# Altium PCB trd5.PcbDoc
Units mm, origin at the board's own origin, x right, y up, seen from the top; angles counter-clockwise.
Board outline 152.4 x 101.6 mm, 2 copper layers (Top Layer, Bottom Layer); 70 components, 140 nets, 475 pads, 133 vias.
Unrouted connection lines stored in the file: 53.
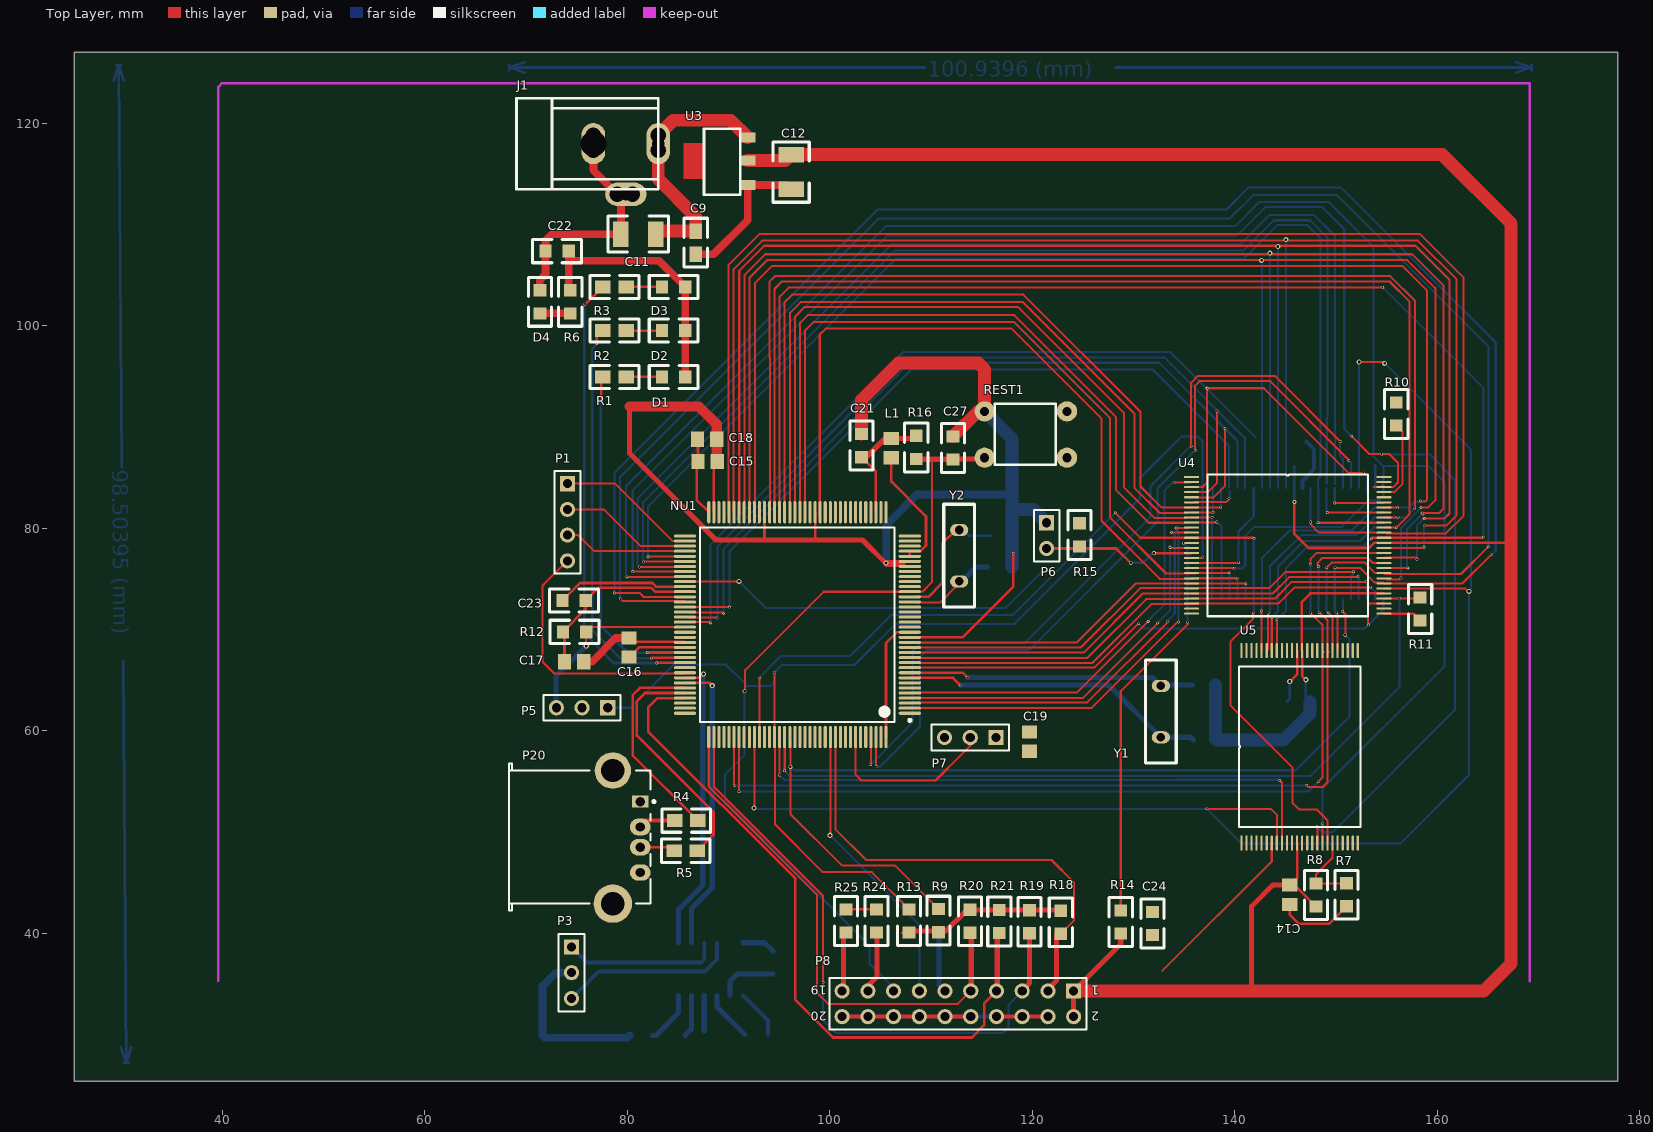
[diagram p0: Top Layer view]
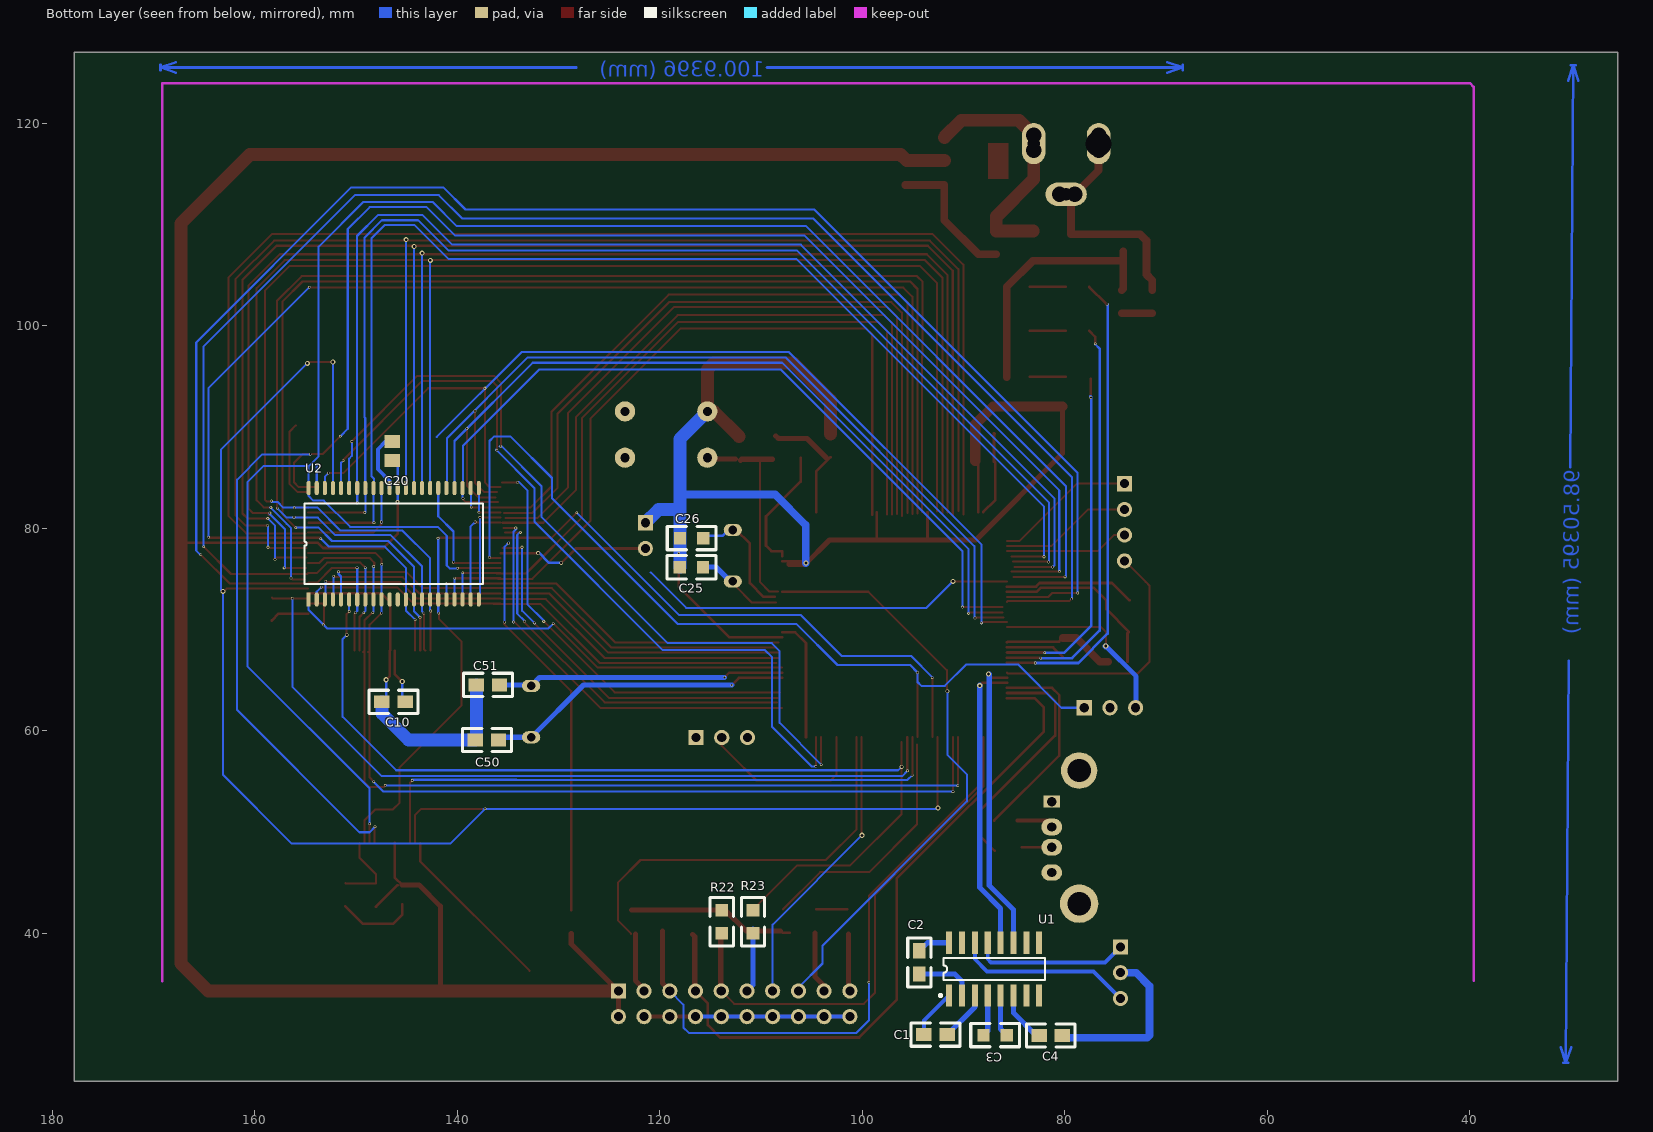
[diagram p1: Bottom Layer view, seen from below]

## Layer stack, top to bottom
Top Layer: signal copper 0.0356
Dielectric: dielectric 0.32, FR-4, Dk 4.8
Bottom Layer: signal copper 0.0356

## Board outline
25.4,25.4 177.8,25.4 177.8,127 25.4,127

## Design rules (kind name [scope] priority, off if disabled: settings)
Clearance [All] p1: gap=0.152
PolygonConnect [All] p1: connectstyle=Relief reliefconductorwidth=0.254 reliefentries=4 polygonreliefangle="90 Angle"
RoutingVias [All] p1: holewidth=0.711 width=1.27 viastyle="Through Hole" minholewidth=0.711 minwidth=1.27 maxholewidth=0.711 maxwidth=1.27
SilkscreenOverComponentPads [All] p1: minsilkscreentomaskgap=0.254
SolderMaskExpansion [All] p1: expansion=0.102
TestPointUsage [All] p1: valid=0 allowmultiple=FALSE
Testpoint [All] p1: side=15 testpointundercomponent=TRUE minsize=1.016 maxsize=2.54 preferedsize=1.524 minholesize=0 maxholesize=1.016 preferedholesize=0.813 testpointgrid=0.025 style=1023 order=0123456789
Width [All] p1: maxlimit=1.27 minlimit=0.152 preferedwidth=0.254 minimp=50.000000 maximp=50.000000 favimp=50.000000
23 further rules are at their usual default settings.

## Classes and differential pairs
net class R3_Nets: NetD3_2 PC8
net class R2_Nets: NetD2_2 PC7
net class R1_Nets: NetD1_2 PC6
net class R19_Nets: PA15 VDD33
net class U4_Nets: A0 A1 A2 A3 A4 A5 A6 A7 A8 A9 A10 A11 A12 A13 A14 A15 A16 A17 A18 A19 A20 A21 A22 D0 D1 D2 D3 D4 D5 D6 D7 D8 D9 D10 D11 D12 D13 D14 D15 GND NetC24_1 NetP6_2 NetR10_1 NetU4_1 NetU4_27 NetU4_28 NetU4_30 NetU4_55 NetU4_56 PD4 PD5 PD6 PG9 VDD33
net class D[0..15]: AD0 AD1 AD2 AD3 AD4 AD5 AD6 AD7 AD8 AD9 AD10 AD11 AD12 AD13 AD14 AD15 AD16 AD17 AD18 AD19 AD20 AD21 AD22 AD23 D0 D1 D2 D3 D4 D5 D6 D7 D8 D9 D10 D11 D12 D13 D14 D15 DATA0 DATA1 DATA2 DATA3 DATA4 DATA5 DATA6 DATA7 DATA8 DATA9 DATA10 DATA11 DATA12 DATA13 DATA14 DATA15 NetU4_1 NetU4_27 NetU4_28 NetU4_30 NetU4_55 NetU4_56
net class U5_Nets: A16 A17 D0 D1 D2 D3 D4 D5 D6 D7 GND NetP5_2 NetR7_1 PD4 PD5 PD7 VDD33
net class A[0..23]: A0 A1 A2 A3 A4 A5 A6 A7 A8 A9 A10 A11 A12 A13 A14 A15 A16 A17 A18 A19 A20 A21 A22 A23 NetU4_1 NetU4_27 NetU4_28 NetU4_30 NetU4_55 NetU4_56
net class U3_Nets: GND VDD5 VDD33
net class U2_Nets: A0 A1 A2 A3 A4 A5 A6 A7 A8 A9 A10 A11 A12 A13 A14 A15 A16 A17 A18 D0 D1 D2 D3 D4 D5 D6 D7 D8 D9 D10 D11 D12 D13 D14 D15 GND PD4 PD5 PE0 PE1 PG10 VDD33
net class REST1_Nets: GND NRST
net class R25_Nets: GND NetP8_19
net class R24_Nets: GND NetP8_17
net class R23_Nets: GND NetP8_11
net class R22_Nets: GND PA14
net class R21_Nets: PA13 VDD33
net class R20_Nets: PA14 VDD33
net class R18_Nets: PB4 VDD33
net class R16_Nets: NRST VDD33
net class R15_Nets: NetP6_2 VDD33
net class R14_Nets: NetC24_1 VDD33
net class R13_Nets: PD6 VDD33
net class R12_Nets: PG6 VDD33
net class R11_Nets: PG9 VDD33
net class R10_Nets: NetR10_1 VDD33
net class R9_Nets: PG10 VDD33
net class R8_Nets: NetR7_1 VDD33
net class R7_Nets: GND NetR7_1
net class R6_Nets: NetD4_1 VDD33
net class R5_Nets: NetP20_3 PA12
net class R4_Nets: NetP20_2 PA11
net class P20_Nets: GND NetP20_2 NetP20_3 NetP20_5 NetP20_6 "USB 5V"
net class P8_Nets: GND NetP8_11 NetP8_17 NetP8_19 NRST PA13 PA14 PA15 PB3 PB4 VDD33
net class P7_Nets: BOOT0 GND VDD33
net class P6_Nets: GND NetP6_2
net class P5_Nets: NetP5_2 PD6 PG6
net class P3_Nets: GND R1IN T1OUT
net class P1_Nets: PA5 PA6 PA7 PA8
net class NU1_Nets: A0 A1 A2 A3 A4 A5 A6 A7 A8 A9 A10 A11 A12 A13 A14 A15 A16 A17 A18 A19 A20 A21 A22 A23 BOOT0 D0 D1 D2 D3 D4 D5 D6 D7 D8 D9 D10 D11 D12 D13 D14 D15 GND LED0 LED1 LED2 NetL1_1 NetNU1_6 NetNU1_106 NRST OSCIN OSCOUT PA0 PA1 PA2 PA3 PA4 PA5 PA6 PA7 PA8 PA9 PA10 PA11 PA12 PA13 PA14 PA15 PB0 PB1 PB2 PB3 PB4 PB5 PB6 PB7 PB8 PB9 PB10 PB11 PB12 PC0 PC1 PC2 PC3 PC4 PC5 PC6 PC7 PC8 PC9 PC10 PC11 PC12 PC13 PC14 PC15 PD2 PD3 PD4 PD5 PD6 PD7 PE0 PE1 PF6 PF10 PF11 PG6 PG7 PG8 PG9 PG10 PG11 PG12 PG13 PG14 PG15 VDD33
net class L1_Nets: NetL1_1 VDD33
net class J1_Nets: GND VDD5
net class D4_Nets: GND NetD4_1
net class D3_Nets: NetD3_2 VDD33
net class D2_Nets: NetD2_2 VDD33
net class D1_Nets: NetD1_2 VDD33
net class C27_Nets: GND NRST
net class C25_Nets: GND OSCIN
net class C24_Nets: GND NetC24_1
net class C23_Nets: GND VDD33
net class C22_Nets: GND VDD33
net class C21_Nets: GND VDD33
net class C20_Nets: GND VDD33
net class C19_Nets: GND VDD33
net class C18_Nets: GND VDD33
net class C17_Nets: GND VDD33
net class C16_Nets: GND VDD33
net class C15_Nets: GND VDD33
net class C14_Nets: GND VDD33
net class C12_Nets: GND VDD33
net class C11_Nets: GND VDD5
net class C10_Nets: GND VDD33
net class C9_Nets: GND VDD5
net class C7_Nets: GND VDD33
net class C3_Nets: NetC3_1 NetC3_2
net class C1_Nets: NetC1_1 NetC1_2
component class "XLAT AND JTAG": C25 C26 C27 P7 P8 R16 R18 R19 R20 R21 R22 R23 R24 R25 REST1 Y2
component class STORAGE: C21 C22 C23 C24 P5 P6 R7 R8 R9 R10 R11 R12 R13 R14 R15 U2 U4 U5
component class POWER: C7 C9 C10 C11 C12 C14 C15 C16 C17 C18 C19 C20 D4 J1 L1 NU1 R6 U3
component class EXTERN: 1 C1 C2 C3 C4 D1 D2 D3 P1 P3 P20 R1 R2 R3 R4 R5 U1
net class C2_Nets: NetC2_2 VDD5
net class C4_Nets: GND NetC4_1
net class U1_Nets: GND NetC1_1 NetC1_2 NetC2_2 NetC3_1 NetC3_2 NetC4_1 NetU1_7 NetU1_8 NetU1_9 NetU1_10 PA9 PA10 R1IN T1OUT VDD5
net class C26_Nets: GND OSCOUT
net class Y2_Nets: OSCIN OSCOUT
component class GPIO_OUT: C50 C51 Y1
net class C50_Nets: GND PC14
net class C51_Nets: GND PC15
net class Y1_Nets: PC14 PC15

## Components (designator, comment, footprint, x,y, rotation, side; value= is the part's Value field where it differs from the comment)
C1 "0.1uF" 0805#1 93.904,29.997 r180 bottom
C2 "0.1uF" 0805#1 94.361,38.278 r270 bottom
C3 "0.1uF" 0805#2 85.725,29.947 r0 bottom
C4 "0.1uF" 0805#1 82.525,29.921 r180 bottom
C9 "102" 0805#1 86.766,109.347 r270 top
C10 "102" 0805#1 145.136,62.865 r0 bottom
C11 "2.2uf" 1210 82.804,109.042 r180 top
C12 "2.2uf" 1210 96.19,116.891 r270 top
C14 "Cap" 6-0805 145.415,43.815 r90 top
C15 "Cap" 6-0805 87.935,86.589 r180 top
C16 "Cap" 6-0805 80.188,68.224 r270 top
C17 "Cap" 6-0805 74.752,66.827 r180 top
C18 "Cap" 6-0805 87.884,88.798 r180 top
C19 "Cap" 6-0805 119.71,58.928 r90 top
C20 "Cap" 6-0805 146.406,87.63 r270 bottom
C21 "Cap" 0805#2 103.124,87.02 r90 top
C22 "Cap" 0805#2 74.219,107.366 r180 top
C23 "Cap" 0805#2 75.895,72.873 r180 top
C24 "Cap" 0805#2 131.877,42.113 r270 top
C25 "Cap" 0805#2 118.008,76.149 r180 bottom
C26 "Cap" 0805#2 117.983,79.019 r180 bottom
C27 "Cap" 0805#2 112.166,89.078 r270 top
C50 "Cap" 0805#1 138.201,59.106 r180 bottom
C51 "Cap" 0805#1 138.1,64.541 r180 bottom
D1 "LED0" 0805#2 85.725,94.945 r180 top
D2 "LED0" 0805#2 85.725,99.517 r180 top
D3 "LED0" 0805#2 85.725,103.835 r180 top
D4 "LED3" 0805#2 71.374,101.219 r90 top
J1 "PWR2.5" Power_In 76.2,120.269 r0 top
L1 "Inductor" 6-0805 106.07,87.909 r90 top
NU1 "STM32F103ZET6" LQFN144 96.799,70.485 r180 top
P1 "Header 4" HDR1X4 74.092,84.404 r270 top
P3 "Header 3" HDR1X3 74.498,38.659 r270 top
P5 "Header 3" HDR1X3 78.08,62.281 r180 top
P6 "Header 2" HDR1X2 121.412,80.543 r270 top
P7 "Header 3" HDR1X3 116.408,59.334 r180 top
P8 "Header 10X2" HDR2X10 124.079,34.315 r180 top
P20 "P10" 787616 68.301,49.505 r180 top
R1 "Res2" 0805#1 77.597,94.945 r0 top
R2 "Res2" 0805#1 77.597,99.517 r0 top
R3 "Res2" 0805#1 77.597,103.835 r0 top
R4 "Res2" 0805#1 84.684,51.13 r0 top
R5 "Res2" 0805#1 84.633,48.158 r0 top
R6 "Res2" 0805#2 74.371,101.219 r90 top
R7 "Res2" 0805#2 151.028,44.958 r270 top
R8 "Res2" 0805#2 148.006,42.647 r90 top
R9 "Res2" 0805#2 110.744,42.393 r270 top
R10 "Res2" 0805#2 155.931,90.145 r90 top
R11 "Res2" 0805#2 158.293,73.177 r270 top
R12 "Res2" 0805#2 75.946,69.774 r180 top
R13 "Res2" 0805#2 107.823,40.081 r90 top
R14 "Res2" 0805#2 128.727,39.98 r90 top
R15 "Res2" 0805#2 124.663,80.493 r270 top
R16 "Res2" 0805#2 108.534,86.843 r90 top
R18 "Res2" 0805#2 122.809,39.954 r90 top
R19 "Res2" 0805#2 119.71,40.005 r90 top
R20 "Res2" 0805#2 113.843,40.056 r90 top
R21 "Res2" 0805#2 116.738,40.03 r90 top
R22 "Res2" 0805#2 113.868,40.005 r90 bottom
R23 "Res2" 0805#2 110.795,40.005 r90 bottom
R24 "Res2" 0805#2 104.623,40.081 r90 top
R25 "Res2" 0805#2 101.6,40.081 r90 top
REST1 "SW_PB" SWPB 123.419,91.542 r0 top
U1 "MAX232-2" SOIC16 86.97,36.474 r180 bottom
U2 "IS61LV51216-10T" TSOP44 154.661,72.974 r90 bottom
U3 "LM1117-3.3" SOT-223 87.579,112.954 r90 top
U4 "M29W128GL" TSOP56 135.712,85.065 r0 top
U5 "NAND512W3A2CN6E" TSOP48 140.64,48.92 r90 top
Y1 "XTAL" XTAL-1 132.69,64.44 r270 top
Y2 "XTAL" XTAL-1 112.776,79.832 r270 top

## Footprints (in the part's own frame and the unit in brackets; to place one, negate y for a bottom-side part, rotate by r counter-clockwise, add the part's x,y. Pads: shape width x height; smd on the part's side, far side on the other; paste and mask are expansions set on the pad)
6-0805 [mm] "Chip Resistor; Body 2.0 x 1.3 mm (LxW typ)"
  rect 1.3x1.5 smd: 1(-0.95,0) 2(0.95,0)
0805#1 [mil]
  rect 60x50 smd: 1(0,0) 2(90,0)
  silkscreen extent -50,-45 140,45
0805#2 [mil]
  rect 47.37x50 smd: 1(0,0) 2(90,0)
  silkscreen extent -50,-45 140,45
1210 [mil]
  rect 60x100 smd: 1(0,0) 2(135,0)
  silkscreen extent -50,-70 185,70
787616 [mm] "Connector; USB1.1, Type A, Thru-Hole; 4 Position; Right Angle"
  rect 1.606x1.2 hole 0.92: 1(-12.99,-3.5)
  oval 2.057x1.676 hole 0.92: 2(-12.99,-1) 3(-12.99,1)
  oval 2.057x1.6 hole 0.92: 4(-12.99,3.5)
  round 3.8 hole 2.3: 5(-10.28,6.57)
  round 3.6 hole 2.3: 6(-10.28,-6.57)
  silkscreen extent -14.47,-7.25 0,7.25
HDR1X2 [mm] "Connector; Header; 2 Position"
  rect 1.5x1.5 hole 0.9: 1(0,0)
  round 1.5 hole 0.9: 2(2.54,0)
  silkscreen extent -1.27,-1.27 3.81,1.27
HDR1X3 [mm] "Connector; Header; 3 Position"
  rect 1.5x1.5 hole 0.9: 1(0,0)
  round 1.5 hole 0.9: 2(2.54,0) 3(5.08,0)
  silkscreen extent -1.27,-1.27 6.35,1.27
HDR1X4 [mm] "Connector; Header; 4 Position"
  rect 1.5x1.5 hole 0.9: 1(0,0)
  round 1.5 hole 0.9: 2(2.54,0) 3(5.08,0) 4(7.62,0)
  silkscreen extent -1.27,-1.27 8.89,1.27
HDR2X10 [mm] "Connector; Header; 10x2 Position"
  rect 1.5x1.5 hole 0.9: 1(0,0)
  round 1.5 hole 0.9: 2(0,2.54) 3(2.54,0) 4(2.54,2.54) 5(5.08,0) 6(5.08,2.54) 7(7.62,0) 8(7.62,2.54) 9(10.16,0) 10(10.16,2.54) 11(12.7,0) 12(12.7,2.54) 13(15.24,0) 14(15.24,2.54) 15(17.78,0) 16(17.78,2.54) 17(20.32,0) 18(20.32,2.54) 19(22.86,0) 20(22.86,2.54)
  silkscreen extent -1.27,-1.27 24.13,3.81
LQFN144 [mm] "TSQFP, 144-Leads, Body 23.8x23.8mm (max), Pitch 0.50mm, IPC Medium Density"
  oval 2.2x0.3 smd: 1(-11.1,8.75) 2(-11.1,8.25) 3(-11.1,7.75) 4(-11.1,7.25) 5(-11.1,6.75) 6(-11.1,6.25) 7(-11.1,5.75) 8(-11.1,5.25) 9(-11.1,4.75) 10(-11.1,4.25) 11(-11.1,3.75) 12(-11.1,3.25) 13(-11.1,2.75) 14(-11.1,2.25) 15(-11.1,1.75) 16(-11.1,1.25) 17(-11.1,0.75) 18(-11.1,0.25) 19(-11.1,-0.25) 20(-11.1,-0.75) 21(-11.1,-1.25) 22(-11.1,-1.75) 23(-11.1,-2.25) 24(-11.1,-2.75) 25(-11.1,-3.25) 26(-11.1,-3.75) 27(-11.1,-4.25) 28(-11.1,-4.75) 29(-11.1,-5.25) 30(-11.1,-5.75) 31(-11.1,-6.25) 32(-11.1,-6.75) 33(-11.1,-7.25) 34(-11.1,-7.75) 35(-11.1,-8.25) 36(-11.1,-8.75) 73(11.1,-8.75) 74(11.1,-8.25) 75(11.1,-7.75) 76(11.1,-7.25) 77(11.1,-6.75) 78(11.1,-6.25) 79(11.1,-5.75) 80(11.1,-5.25) 81(11.1,-4.75) 82(11.1,-4.25) 83(11.1,-3.75) 84(11.1,-3.25) 85(11.1,-2.75) 86(11.1,-2.25) 87(11.1,-1.75) 88(11.1,-1.25) 89(11.1,-0.75) 90(11.1,-0.25) 91(11.1,0.25) 92(11.1,0.75) 93(11.1,1.25) 94(11.1,1.75) 95(11.1,2.25) 96(11.1,2.75) 97(11.1,3.25) 98(11.1,3.75) 99(11.1,4.25) 100(11.1,4.75) 101(11.1,5.25) 102(11.1,5.75) 103(11.1,6.25) 104(11.1,6.75) 105(11.1,7.25) 106(11.1,7.75) 107(11.1,8.25) 108(11.1,8.75)
  oval 0.3x2.2 smd: 37(-8.75,-11.1) 38(-8.25,-11.1) 39(-7.75,-11.1) 40(-7.25,-11.1) 41(-6.75,-11.1) 42(-6.25,-11.1) 43(-5.75,-11.1) 44(-5.25,-11.1) 45(-4.75,-11.1) 46(-4.25,-11.1) 47(-3.75,-11.1) 48(-3.25,-11.1) 49(-2.75,-11.1) 50(-2.25,-11.1) 51(-1.75,-11.1) 52(-1.25,-11.1) 53(-0.75,-11.1) 54(-0.25,-11.1) 55(0.25,-11.1) 56(0.75,-11.1) 57(1.25,-11.1) 58(1.75,-11.1) 59(2.25,-11.1) 60(2.75,-11.1) 61(3.25,-11.1) 62(3.75,-11.1) 63(4.25,-11.1) 64(4.75,-11.1) 65(5.25,-11.1) 66(5.75,-11.1) 67(6.25,-11.1) 68(6.75,-11.1) 69(7.25,-11.1) 70(7.75,-11.1) 71(8.25,-11.1) 72(8.75,-11.1) 109(8.75,11.1) 110(8.25,11.1) 111(7.75,11.1) 112(7.25,11.1) 113(6.75,11.1) 114(6.25,11.1) 115(5.75,11.1) 116(5.25,11.1) 117(4.75,11.1) 118(4.25,11.1) 119(3.75,11.1) 120(3.25,11.1) 121(2.75,11.1) 122(2.25,11.1) 123(1.75,11.1) 124(1.25,11.1) 125(0.75,11.1) 126(0.25,11.1) 127(-0.25,11.1) 128(-0.75,11.1) 129(-1.25,11.1) 130(-1.75,11.1) 131(-2.25,11.1) 132(-2.75,11.1) 133(-3.25,11.1) 134(-3.75,11.1) 135(-4.25,11.1) 136(-4.75,11.1) 137(-5.25,11.1) 138(-5.75,11.1) 139(-6.25,11.1) 140(-6.75,11.1) 141(-7.25,11.1) 142(-7.75,11.1) 143(-8.25,11.1) 144(-8.75,11.1)
  silkscreen extent -11.23,-9.6 9.6,9.6, body extent -10,-10 10,10, height 1.6
Power_In [mil]
  rect 60x60 hole 60: 1(270,-116) 2(170,-287) 3(18,-57)
  oval 92x160 hole 47: 1(270,-90)
  rect 50x60 hole 60: 1(270,-57) 3(18,-116)
  rect 60x50 hole 60: 2(111,-287)
  oval 160x92 hole 47: 2(144,-287)
  oval 92x160 hole 100: 3(18,-90)
  silkscreen extent -281,-267 270,87
SOIC16 [mm]
  rect 0.6x2.2 smd: 1(-4.445,-2.6) 2(-3.175,-2.6) 3(-1.905,-2.6) 4(-0.635,-2.6) 5(0.635,-2.6) 6(1.905,-2.6) 7(3.175,-2.6) 8(4.445,-2.6) 9(4.445,2.6) 10(3.175,2.6) 11(1.905,2.6) 12(0.635,2.6) 13(-0.635,2.6) 14(-1.905,2.6) 15(-3.175,2.6) 16(-4.445,2.6)
  silkscreen extent -5.42,-2.72 5,1.1
SOT-223 [mm]
  rect 1x1.5 smd: 1(0.95,-4.31) 2(3.35,-4.31) 3(5.65,-4.31)
  Top Layer region: 1.524,0 5.08,0 5.08,2.032 1.524,2.032
  silkscreen extent 0,-3.56 6.5,0
SWPB [mm]
  round 2 hole 0.9: 1(-8.128,0) 2(-8.128,-4.572) 3(0,-4.572) 4(0,0)
  silkscreen extent -7.13,-5.25 -1.13,0.75
TSOP44 [mm]
  rect 1.4x0.4 smd: 1(0,0)
  oval 1.4x0.4 smd: 2(0,-0.8) 3(0,-1.6) 4(0,-2.4) 5(0,-3.2) 6(0,-4) 7(0,-4.8) 8(0,-5.6) 9(0,-6.4) 10(0,-7.2) 11(0,-8) 12(0,-8.8) 13(0,-9.6) 14(0,-10.4) 15(0,-11.2) 16(0,-12) 17(0,-12.8) 18(0,-13.6) 19(0,-14.4) 20(0,-15.2) 21(0,-16) 22(0,-16.8) 23(11,-16.8) 24(11,-16) 25(11,-15.2) 26(11,-14.4) 27(11,-13.6) 28(11,-12.8) 29(11,-12) 30(11,-11.2) 31(11,-10.4) 32(11,-9.6) 33(11,-8.8) 34(11,-8) 35(11,-7.2) 36(11,-6.4) 37(11,-5.6) 38(11,-4.8) 39(11,-4) 40(11,-3.2) 41(11,-2.4) 42(11,-1.6) 43(11,-0.8) 44(11,0)
  silkscreen extent 1.53,-17.2 9.47,0.4
TSOP48 [mm]
  rect 1.5x0.22 smd: 1(0,0)
  oval 1.5x0.22 smd: 2(0,-0.5) 3(0,-1) 4(0,-1.5) 5(0,-2) 6(0,-2.5) 7(0,-3) 8(0,-3.5) 9(0,-4) 10(0,-4.5) 11(0,-5) 12(0,-5.5) 13(0,-6) 14(0,-6.5) 15(0,-7) 16(0,-7.5) 17(0,-8) 18(0,-8.5) 19(0,-9) 20(0,-9.5) 21(0,-10) 22(0,-10.5) 23(0,-11) 24(0,-11.5) 25(19,-11.5) 26(19,-11) 27(19,-10.5) 28(19,-10) 29(19,-9.5) 30(19,-9) 31(19,-8.5) 32(19,-8) 33(19,-7.5) 34(19,-7) 35(19,-6.5) 36(19,-6) 37(19,-5.5) 38(19,-5) 39(19,-4.5) 40(19,-4) 41(19,-3.5) 42(19,-3) 43(19,-2.5) 44(19,-2) 45(19,-1.5) 46(19,-1) 47(19,-0.5) 48(19,0)
  silkscreen extent 1.58,-11.75 17.42,0.25
TSOP56 [mm]
  rect 1.5x0.2 smd: 1(0,0)
  oval 1.5x0.2 smd: 2(0,-0.5) 3(0,-1) 4(0,-1.5) 5(0,-2) 6(0,-2.5) 7(0,-3) 8(0,-3.5) 9(0,-4) 10(0,-4.5) 11(0,-5) 12(0,-5.5) 13(0,-6) 14(0,-6.5) 15(0,-7) 16(0,-7.5) 17(0,-8) 18(0,-8.5) 19(0,-9) 20(0,-9.5) 21(0,-10) 22(0,-10.5) 23(0,-11) 24(0,-11.5) 25(0,-12) 26(0,-12.5) 27(0,-13) 28(0,-13.5) 29(19,-13.5) 30(19,-13) 31(19,-12.5) 32(19,-12) 33(19,-11.5) 34(19,-11) 35(19,-10.5) 36(19,-10) 37(19,-9.5) 38(19,-9) 39(19,-8.5) 40(19,-8) 41(19,-7.5) 42(19,-7) 43(19,-6.5) 44(19,-6) 45(19,-5.5) 46(19,-5) 47(19,-4.5) 48(19,-4) 49(19,-3.5) 50(19,-3) 51(19,-2.5) 52(19,-2) 53(19,-1.5) 54(19,-1) 55(19,-0.5) 56(19,0)
  silkscreen extent 1.58,-13.75 17.42,0.25
XTAL-1 [mm]
  oval 1.203x1.8 hole 0.85: 1(0,0) 2(5.08,0)
  silkscreen extent -2.54,-1.52 7.62,1.52

## Part data
C1 C2 C3 C4 C9 C10 C11 C12: library part CAP, "Capacitor"
C14 C15 C16 C17 C18 C19 C20 C21 C22 C23 C24 C25 C26 C27 C50 C51: "Capacitor"
D1 D2 D3: "Typical INFRARED GaAs LED"
D4: "Typical BLUE SiC LED"
J1: "Low Voltage Power Supply Connector"
P1: "Header, 4-Pin"
P3 P5 P7: "Header, 3-Pin"
P6: "Header, 2-Pin"
P8: "Header, 10-Pin, Dual row"
P20: library part COMPONENT_1
R1 R2 R3 R4 R5 R6 R7 R8 R9 R10 R11 R12 R13 R14 R15 R16 R18 R19 R20 R21 R22 R23 R24 R25: "Resistor"
U1: library part MAX3232-2
Y1 Y2: "Crystal Oscillator"

## Via types
v1: diameter 0.254, hole 0.178, Top Layer to Bottom Layer, 81 vias
v2: diameter 0.305, hole 0.178, Top Layer to Bottom Layer, 30 vias
v3: diameter 0.5, hole 0.254, Top Layer to Bottom Layer, 8 vias
v4: diameter 0.508, hole 0.254, Top Layer to Bottom Layer, 5 vias
v5: diameter 0.381, hole 0.254, Top Layer to Bottom Layer, 5 vias
v6: diameter 0.508, hole 0.305, Top Layer to Bottom Layer, 3 vias
v7: diameter 0.381, hole 0.178, Top Layer to Bottom Layer, 1 vias

## Nets (pads, with @x,y where several pads share a name; then routed paths per layer and width w, separated by ;. In a path a pad name is that pad's centre, name@x,y a point inside that pad or via, vN(x,y) a via of type N, cw(c..) or ccw(c..) an arc to the next point about the centre after c; other vN are vias at no path point)
A0: NU1.10 U2.1 U4.31 | length 54.2
  Top Layer w0.203: NU1.10 126.128,66.235 130.454,70.561 v1@130.454,70.612 ; v1@153.162,70.409 153.162,72.415 153.311,72.565 U4.31
  Bottom Layer w0.203: v1(130.505,70.587) 130.988,70.104 152.832,70.104 154.661,71.933 U2.1
  other v1: 153.213,70.46
A1: NU1.11 U2.2 U4.26 | length 50.1
  Top Layer w0.203: NU1.11@108.483,66.7 125.933,66.7 131.775,72.542 U4.26@136.423,72.542 ; U4.26 144.294,72.565 145.898,74.168 v1@153.416,74.168
  Bottom Layer w0.203: v1(153.416,74.193) 153.861,73.749 U2.2
A2: NU1.12 U2.3 U4.25 | length 49.4
  Top Layer w0.203: NU1.12@108.229,67.208 125.451,67.208 131.242,73 U4.25@135.56,73 ; U4.25 143.981,73.065 145.618,74.701 v1@153.01,74.701
  Bottom Layer w0.203: U2.3@152.984,73.051 v1(152.984,74.752)
A3: NU1.13 U2.4 U4.24 | length 48.9
  Top Layer w0.203: NU1.13@108.255,67.716 125.07,67.716 130.912,73.558 U4.24@135.357,73.558 ; U4.24 143.745,73.565 145.364,75.184 v1@152.197,75.184
  Bottom Layer w0.203: U2.4@152.197,73.038 v1(152.197,75.26)
A4: NU1.14 U2.5 U4.23 | length 49.1
  Top Layer w0.203: NU1.14@108.509,68.224 124.79,68.224 130.658,74.092 143.408,74.092 144.983,75.667 v1@151.714,75.667
  Bottom Layer w0.203: U2.5 151.461,75.235 151.714,75.489 v1(151.714,75.717)
A5: NU1.15 U2.18 U4.22 | length 36.6
  Top Layer w0.203: NU1.15@108.28,68.707 124.358,68.707 130.2,74.549 U4.22@135.611,74.549 ; U4.22 v1@141.031,74.565
  Bottom Layer w0.203: U2.18 v1@141.061,74.535
  other v1: 141.072,74.524
A6: NU1.50 U2.19 U4.21 | length 77.7
  Top Layer w0.203: NU1.50@99.009,81.331 99.009,99.136 99.593,99.72 117.958,99.72 126.848,90.83 126.848,80.721 132.563,75.006 U4.21@135.941,75.006 ; U4.21 v1@140.216,75.065
  Bottom Layer w0.203: U2.19 v1@140.261,75.03
  other v1: 140.233,75.082
A7: NU1.53 U2.20 U4.20 | length 79.5
  Top Layer w0.203: 97.536,94.894 97.536,99.517 98.4,100.381 118.161,100.381 127.686,90.856 127.686,81.051 133.198,75.54 U4.20@136.119,75.54 ; NU1.53@97.561,81.382 97.561,94.996 ; U4.20 v1@139.395,75.565
  Bottom Layer w0.203: U2.20 v1@139.461,75.576
  other v1: 139.446,75.616
A8: NU1.54 U2.21 U4.10 | length 80.8
  Top Layer w0.203: NU1.54@97.079,81.356 97.079,100.305 97.815,101.041 118.212,101.041 128.245,91.008 128.245,83.795 131.496,80.543 U4.10@135.509,80.543 ; U4.10 v1@138.282,80.565
  Bottom Layer w0.203: v1(138.227,80.62) 138.661,80.186 U2.21
A9: NU1.55 U2.22 U4.9 | length 81.5
  Top Layer w0.203: NU1.55@96.571,81.407 96.571,100.914 97.485,101.829 118.593,101.829 129.032,91.389 129.032,84.049 132.055,81.026 U4.9@135.23,81.026 ; U4.9 v1@137.807,81.065
  Bottom Layer w0.203: U2.22@137.744,73.091 v1(137.744,81.077)
A10: NU1.56 U2.23 U4.8 | length 77.2
  Top Layer w0.203: NU1.56@96.088,81.204 96.088,101.295 97.13,102.337 119.075,102.337 130.073,91.338 130.073,83.998 132.563,81.509 U4.8@135.382,81.509 ; U4.8 137.8,81.565 v1@137.82,81.585
  Bottom Layer w0.203: v1(137.846,81.585) U2.23@137.846,83.959
A11: NU1.57 U2.24 U4.7 | length 79.1
  Top Layer w0.203: NU1.57@95.529,81.534 95.529,102.311 96.291,103.073 119.101,103.073 130.683,91.491 130.683,84.125 132.766,82.042 U4.7@135.788,82.042 ; U4.7 v1@138.585,82.065
  Bottom Layer w0.203: v1(138.608,82.093) U2.24@138.608,83.921
A12: NU1.87 U2.25 U4.6 | length 77.7
  Top Layer w0.203: NU1.87@86.157,72.212 v2@90.043,72.212 ; U4.6@135.941,82.575 139.141,82.575 v2@139.395,82.829
  Bottom Layer w0.203: v2(90.094,72.212) 90.094,77.749 108.026,95.682 131.902,95.682 139.421,88.163 U2.25@139.421,84.049 ; U2.25@139.446,83.744 139.446,83.033 v2@139.471,83.007
  other v2: 139.421,82.931
A13: NU1.88 U2.26 U4.5 | length 84.8
  Top Layer w0.203: NU1.88@86.131,71.704 v2@89.459,71.704 ; U4.5@136.22,83.033 137.871,83.033 139.04,84.201 v2@139.04,89.789
  Bottom Layer w0.203: v2(89.484,71.603) 89.484,77.927 107.899,96.342 132.537,96.342 140.261,88.619 U2.26
  other v2: 139.04,89.84
A14: NU1.89 U2.27 U4.4 | length 87.7
  Top Layer w0.203: NU1.89@86.055,71.196 v2@88.849,71.196 ; U4.4@136.042,83.591 137.363,83.591 138.227,84.455 v2@138.227,91.618
  Bottom Layer w0.203: v2@88.925,71.12 88.925,78.232 107.569,96.876 133.02,96.876 140.995,88.9 U2.27@140.995,83.947
  other v2: 88.875,71.145 138.227,91.592
A15: NU1.90 U2.42 U4.3 | length 107.6
  Top Layer w0.203: NU1.90 v2@88.21,70.735 ; U4.3 135.722,84.074 136.804,84.074 137.262,84.531 v2(137.262,93.828) ; v2@137.262,93.878 v2(137.262,93.828) ; v1@152.73,85.496 152.705,85.471 151.206,85.471 142.85,93.828 v2(137.262,93.828)
  Bottom Layer w0.203: v2@88.214,70.612 88.214,78.384 107.239,97.409 133.629,97.409 142.011,89.027 ; v1(152.705,85.446) 153.061,85.09 U2.42 U2.42@153.061,83.414
  other v2: 88.24,70.663
A16: NU1.80 U2.43 U4.54 U5.16 | length 180.3
  Top Layer w0.203: v2(80.518,75.717) NU1.80@85.268,75.717 ; U5.16 v1@148.14,50.412 ; v1(151.536,89.078) 153.289,87.325 v1(154.483,87.325) 155.27,87.325 156.108,86.487 156.108,84.531 155.642,84.065 U4.54 ; 153.679,84.065 U4.54 ; 154.566,84.211 U4.54
  Bottom Layer w0.203: v2@80.543,75.768 80.543,83.744 105.689,108.89 140.183,108.89 143.002,111.709 148.641,111.709 150.8,109.55 150.8,89.814 v1@151.511,89.103 ; v1(148.107,50.521) 148.641,49.987 149.657,49.987 161.722,62.052 161.722,84.811 159.233,87.3 v1@154.483,87.3 ; U2.43 153.861,86.131 153.861,86.246
A17: NU1.81 U2.44 U4.19 U5.17 | length 197.2
  Top Layer w0.203: v2@79.934,75.184 NU1.81@85.039,75.184 ; U4.19 139.895,76.065 v1@139.929,76.098 ; U5.17 v1@148.64,50.776
  Bottom Layer w0.203: v2@79.883,75.26 79.883,84.176 105.537,109.83 140.03,109.83 142.418,112.217 149.25,112.217 153.67,107.798 153.67,87.097 154.661,86.106 ; v1(139.954,76.048) 140.741,76.048 141.021,76.327 141.021,79.248 141.91,80.137 150.571,80.137 153.162,82.728 154.203,82.728 154.661,83.185 U2.44 154.661,86.106 ; v1(148.641,50.825) 148.641,54.305 160.706,66.37 160.706,84.557 159.106,86.157 154.711,86.157 154.661,86.106
  other v2: 79.985,75.209
A18: NU1.82 U2.28 U4.18 | length 50.3
  Top Layer w0.203: NU1.82 v3@91,74.735 ; U4.18 v1@140.402,76.565
  Bottom Layer w0.203: v3(91.034,74.752) 93.65,72.136 117.373,72.136 120.879,75.641 ; v1(140.36,76.657) 140.36,79.68 141.861,81.18 U2.28
A19: NU1.2 U4.11 | length 40.5
  Top Layer w0.203: NU1.2 125.811,62.235 v2@134.315,70.739 ; v2(134.214,80.035) U4.11@135.407,80.035
  Bottom Layer w0.203: v2@134.163,79.934 134.417,79.68 v2@134.417,70.688
  other v2: 134.417,70.739
A20: NU1.3 U4.12 | length 38.9
  Top Layer w0.203: NU1.3@108.433,62.814 125.425,62.814 v2@133.401,70.79 ; v2@133.883,79.578 U4.12@135.28,79.578
  Bottom Layer w0.203: v2@133.325,70.841 134.061,71.577 134.061,79.35 v2@133.756,79.654
  other v2: 133.35,70.79 133.756,79.604
A21: NU1.4 U4.15 | length 37
  Top Layer w0.203: NU1.4@108.306,63.221 124.968,63.221 v2@132.436,70.688 ; 133.731,78.054 U4.15@135.509,78.054
  Bottom Layer w0.203: v2@132.334,70.612 133.579,71.857 v2(133.579,78.13)
  other v2: 132.359,70.663
A22: NU1.5 U4.2 | length 42.5
  Top Layer w0.203: NU1.5@108.128,63.805 124.435,63.805 v2(131.445,70.815) ; v2(134.036,84.531) U4.2@135.56,84.531
  Bottom Layer w0.203: v2@131.42,70.866 133.071,72.517 133.071,83.744 133.909,84.582 v2@133.96,84.582
A23: NU1.1
BOOT0: NU1.138 P7.2 | length 17.6
  Top Layer w0.203: NU1.138 102.549,55.667 103.124,55.093 110.439,55.093 112.966,57.62 ; 112.878,57.531 112.966,57.62 ; P7.2 113.868,58.522 112.966,57.62
D0: NU1.85 U2.7 U4.35 U5.29 | length 170.5
  Top Layer w0.203: 78.867,73.609 81.229,73.609 81.603,73.235 NU1.85 ; v1@149.911,76.098 152.349,76.098 153.822,74.625 154.652,74.625 U4.35 162.474,74.565 v1(165.303,77.394) ; v1@150.012,71.653 150.14,71.526 U5.29
  Bottom Layer w0.203: v1(78.715,73.609) 78.74,73.635 78.74,85.471 104.75,111.481 139.167,111.481 141.351,113.665 150.444,113.665 165.76,98.349 165.76,77.8 v1@165.354,77.394 ; v1@149.861,76.124 U2.7 149.861,71.856 v1(150.038,71.679)
  other v1: 149.885,76.124
D1: NU1.86 U2.8 U4.37 U5.30 | length 167.9
  Top Layer w0.203: v1(79.324,73.025) 79.518,72.831 85.603,72.831 NU1.86 ; v1(149.073,76.124) 149.555,76.606 152.832,76.606 153.874,75.565 U4.37 154.788,75.489 162.331,75.489 v1(165.024,78.181) ; v1@149.276,71.603 149.64,71.239 U5.30
  Bottom Layer w0.203: v1(79.324,73.025) 79.299,73.05 79.299,85.065 104.826,110.592 139.497,110.592 141.808,112.903 150.089,112.903 165.024,97.968 v1(165.024,78.181) v1@165.024,78.156 ; v1@149.061,76.137 U2.8 149.061,71.818 v1(149.225,71.653)
D2: NU1.114 U2.9 U4.39 U5.31 | length 92.8
  Top Layer w0.203: v1@90.549,54.561 NU1.114 ; v1(147.091,54.61) 147.244,54.458 148.666,54.458 149.14,54.931 U5.31 ; v1@148.336,76.225 148.184,76.378 148.184,76.606 148.641,77.064 153.137,77.064 153.636,76.565 U4.39 ; v1@148.361,71.679 149.14,70.9 U5.31 ; 149.276,67.784 U5.31
  Bottom Layer w0.203: v1(90.551,54.585) v1@147.091,54.585 ; v1@148.261,71.754 U2.9 v1@148.261,76.252
  other v1: 148.336,71.679 148.234,76.225
D3: NU1.115 U2.10 U4.41 U5.32 | length 93.4
  Top Layer w0.203: v1@91.049,53.985 NU1.115 ; v1(147.447,76.429) 147.447,76.937 148.075,77.565 U4.41 ; v1@147.498,71.653 147.498,71.628 148.64,70.486 U5.32 ; v1(148.234,54.991) 148.64,55.396 U5.32 ; 148.776,67.784 U5.32
  Bottom Layer w0.203: v1(91.034,54) 147.269,54 v1@148.26,54.991 ; v1@147.461,71.64 U2.10 v1@147.461,76.442
  other v1: 147.472,71.628
D4: NU1.58 U2.13 U4.44 U5.41 | length 139.5
  Top Layer w0.203: NU1.58@95.047,81.432 95.047,102.87 95.936,103.759 v1@154.661,103.759 ; U5.41 v1@144.14,71.013 ; v1@153.492,78.943 v1(153.467,78.969) 153.563,79.065 U4.44 v1@164.485,79.065
  Bottom Layer w0.203: v1(144.145,70.968) 145.061,71.883 U2.13 145.061,76.1 147.142,78.181 152.654,78.181 153.441,78.969 v1(153.467,78.969) ; v1(154.584,103.81) 164.567,93.828 164.567,79.146 v1(164.541,79.121)
D5: NU1.59 U2.14 U4.46 U5.42 | length 131.9
  Top Layer w0.203: NU1.59@94.539,81.483 94.539,103.632 95.275,104.369 155.27,104.369 157.251,102.387 157.251,81.382 v1(155.931,80.061) ; U5.42 v1@143.64,71.148 ; U4.46 v1@155.927,80.065
  Bottom Layer w0.203: v1@143.764,71.222 v1(143.662,71.222) 144.261,71.82 U2.14 144.261,76.214 146.787,78.74 152.349,78.74 153.67,80.061 v1(155.931,80.061) v1@155.956,80.061
D6: NU1.60 U2.15 U4.48 U5.43 | length 134.9
  Top Layer w0.203: 94.031,96.85 94.031,104.343 94.59,104.902 155.346,104.902 157.785,102.464 157.785,82.753 ; NU1.60@94.082,81.61 94.082,97.003 ; U5.43 143.276,68.056 v1@143.276,71.622 ; U4.48 v1@156.095,81.065 ; v1@157.785,82.042 157.785,82.753 ; 157.785,82.626 157.785,82.753
  Bottom Layer w0.203: v1(143.281,71.628) 143.461,71.807 U2.15 143.461,76.227 146.558,79.324 152.019,79.324 153.746,81.051 156.82,81.051 v1(157.759,81.991)
  other v1: 156.108,81.102
D7: NU1.63 U2.16 U4.50 U5.44 | length 140.6
  Top Layer w0.203: NU1.63@92.608,81.636 92.608,104.191 94.336,105.918 156.515,105.918 158.979,103.454 158.979,82.804 158.826,82.652 v2@158.369,82.652 ; U5.44 v1@142.64,71.875 ; U4.50@154.664,82.017 U4.50 156.106,82.065 v1@156.108,82.067
  Bottom Layer w0.203: v1@142.661,71.896 U2.16 ; U2.16@142.697,72.974 U2.16 ; v2@158.344,82.601 157.734,82.601 157.201,82.067 153.822,82.067 151.536,79.781 145.415,79.781 142.661,77.027 U2.16
  other v1: 142.596,71.831 156.083,82.017
  other v2: 158.344,82.702
D8: NU1.64 U2.29 U4.36 | length 147.3
  Top Layer w0.203: NU1.64@92.075,81.458 92.075,104.75 93.802,106.477 157.023,106.477 159.791,103.708 159.791,82.753 159.106,82.067 v2@158.369,82.067 ; 155.016,74.955 156.235,74.955 v2@156.362,75.082
  Bottom Layer w0.203: U2.29 v3@142.661,106.491 ; v2@156.388,75.108 156.388,79.985 156.832,80.429 v2@158.471,82.067
  other v2: 156.413,75.082 158.394,82.067
  other v3: 142.646,106.451
D9: NU1.65 U2.30 U4.38 | length 150.3
  Top Layer w0.203: NU1.65@91.592,81.585 91.592,105.029 93.624,107.061 157.505,107.061 160.579,103.988 160.579,81.915 160.172,81.509 v2(158.496,81.509) 158.598,81.407 158.598,81.331 ; U4.38@154.94,76.098 v2(157.074,76.098)
  Bottom Layer w0.203: U2.30 v3@143.461,107.009 ; v2@156.997,76.098 156.997,79.908 v2@158.547,81.458
  other v3: 143.459,107.163
D10: NU1.66 U2.31 U4.40 | length 153.8
  Top Layer w0.203: NU1.66@91.059,81.382 91.059,105.435 93.523,107.899 157.836,107.899 161.188,104.546 161.188,81.458 160.68,80.95 v2(158.699,80.95) ; U4.40@154.889,77.114 157.912,77.114 v2@158.013,77.013 ; v2@158.623,80.975 v2@158.648,80.95
  Bottom Layer w0.203: U2.31 v3@144.261,107.939 ; v2@157.963,77.013 157.963,80.264 v2@158.648,80.95
  other v2: 157.988,76.911
  other v3: 144.247,107.823
D11: NU1.67 U2.32 U4.42 | length 155.1
  Top Layer w0.203: NU1.67@90.5,81.686 90.5,105.588 93.32,108.407 158.064,108.407 161.9,104.572 161.9,81.28 160.884,80.264 v2(158.725,80.264) ; U4.42@154.889,78.054 158.496,78.054
  Bottom Layer w0.203: U2.32 v3@145.061,108.434 ; v2@158.674,78.156 v2@158.674,80.239
  other v2: 158.674,78.13
  other v3: 145.034,108.509
D12: NU1.68 U2.35 U4.45 | length 143.4
  Top Layer w0.203: NU1.68@90.018,81.382 90.018,106.02 93.066,109.068 158.267,109.068 162.585,104.75 162.585,81.255 160.833,79.502 U4.45@154.965,79.502 ; v1(147.472,80.62) 147.472,80.391 148.299,79.565 U4.45
  Bottom Layer w0.203: v1@147.461,80.53 U2.35
D13: NU1.77 U2.36 U4.47 | length 121.3
  Top Layer w0.203: v2@82.067,77.216 NU1.77@85.242,77.216 ; v1(148.209,80.543) U4.47@154.691,80.543
  Bottom Layer w0.203: v2@82.067,77.191 82.067,82.169 106.502,106.604 140.868,106.604 144.196,109.931 147.168,109.931 148.438,108.661 148.438,85.115 148.209,84.887 U2.36@148.209,83.871 ; v1@148.261,80.544 U2.36
  other v2: 82.042,77.191
D14: NU1.78 U2.37 U4.49 | length 121.6
  Top Layer w0.203: v2@81.61,76.733 NU1.78@85.09,76.733 ; v1(149.123,81.559) U4.49@154.707,81.559
  Bottom Layer w0.203: v2@81.534,76.759 81.534,82.525 106.426,107.417 140.843,107.417 143.84,110.414 147.422,110.414 149.149,108.687 149.149,90.983 149.073,90.907 149.073,84.43 U2.37@149.098,84.404 ; U2.37@148.971,83.885 U2.37 v1@149.061,81.547
  other v2: 81.61,76.683
D15: NU1.79 U2.38 U4.51 | length 122.9
  Top Layer w0.203: v2@81.153,76.175 v2(81.204,76.175) NU1.79@84.938,76.175 ; v1(149.86,82.499) U4.51@154.647,82.499
  Bottom Layer w0.203: v2(81.204,76.175) 81.001,76.378 81.001,82.931 106.07,108.001 140.487,108.001 143.434,110.947 143.789,110.947 ; 143.637,110.947 143.789,110.947 ; v1@149.861,82.549 U2.38 ; U2.38@149.885,84.303 149.885,90.932 ; 149.885,90.957 149.885,108.864 147.803,110.947 143.789,110.947
GND: C4.2 C9.2 C10.2 C11.2 C12.2 C14.1 C15.1 C16.1 C17.1 C18.1 C19.1 C20.1 C21.2 C22.2 C23.2 C24.2 C25.1 C26.1 C27.1 C50.1 C51.1 D4.2 J1.2 J1.3 NU1.16 NU1.30 NU1.31 NU1.38 NU1.51 NU1.61 NU1.71 NU1.83 NU1.94 NU1.107 NU1.120 NU1.130 NU1.143 P3.2 P6.1 P7.3 P8.4 P8.6 P8.8 P8.10 P8.12 P8.14 P8.16 P8.18 P8.20 P20.4 R7.2 R22.2 R23.2 R24.2 R25.2 REST1.1 U1.15 U2.12 U2.34 U3.1 U4.33 U4.52 U5.13 U5.36 | length 302.4
  Top Layer w0.254: C23.2 75.336,74.6 82.474,74.6 82.839,74.235 NU1.83 ; C16.1 80.557,68.806 85.629,68.806 NU1.94 ; NU1.71 88.549,86.304 C15.1@88.758,86.512 ; 93.549,78.97 NU1.61 ; 98.549,79.144 NU1.51 ; R25.2@101.473,42.393 R24.2@104.546,42.393 ; v6@105.739,76.735 NU1.31 ; NU1.16 113.101,69.235 118.135,74.27 118.135,77.495 v1(118.11,77.521) ; C14.1 145.415,41.859 146.329,40.945 149.301,40.945 R7.2 ; v4@146.99,65.075 146.64,65.425 U5.36 146.609,67.951 146.609,72.72 147.453,73.565 U4.33
  Top Layer w0.381: P8.20 P8.18 P8.16 P8.14 P8.12 P8.10 ; P8.8 P8.6 P8.4
  Top Layer w0.508: 80.213,92.024 80.213,87.401 88.773,78.842 103.226,78.842 105.613,76.454 107.239,76.454
  Top Layer w0.762: D4.2 71.374,104.496 71.933,105.054 C22.2 71.933,108.407 72.568,109.042 C11.2 79.375,112.624 79.019,112.979 76.657,115.341 76.657,117.323 J1.3@76.657,117.983 ; C17.1 76.53,66.827 78.877,69.174 C16.1 ; C9.2 88.519,107.061 91.889,110.431 U3.1 C12.2@95.748,113.904
  Top Layer w1.016: 80.213,92.024 87.071,92.024 88.834,90.261 C18.1 C15.1@88.834,86.639
  Top Layer w1.27: C21.2 103.124,92.659 106.782,96.317 114.656,96.317 115.291,95.682 REST1.1 114.63,91.542 C27.1
  Bottom Layer w0.254: C10.2@147.015,63.271 v4(147.015,65.049)
  Bottom Layer w0.381: P8.20 P8.18 P8.16 P8.14 P8.12 P8.10 P8.8 ; U2.34 146.661,84.659 147.828,85.827 147.828,87.808 C20.1@147.056,88.58
  Bottom Layer w0.762: P3.2 72.949,36.119 71.628,34.798 71.628,29.947 71.882,29.693 80.01,29.693 C4.2 ; v6(105.562,76.581) 105.562,80.315 108.585,83.337 118.008,83.337
  Bottom Layer w1.27: REST1.1 118.008,88.824 118.008,83.337 118.008,81.839 ; C25.1 118.008,79.019 118.008,81.839 ; P6.1 120.117,81.839 118.008,81.839 ; C50.1@138.1,59.207 C51.1 ; C50.1 144.805,59.106 147.422,61.722 C10.2
LED0: NU1.19
LED1: NU1.20
LED2: NU1.21
NetC1_1: C1.1 U1.1 | length 4.9
  Bottom Layer w0.381: U1.1 93.904,31.385 C1.1
NetC1_2: C1.2 U1.3 | length 5
  Bottom Layer w0.508: U1.3 88.875,32.741 C1.2
NetC2_2: C2.2 U1.2 | length 5.9
  Bottom Layer w0.508: U1.2 90.145,35.281 90.856,35.992 C2.2
NetC3_1: C3.1 U1.5 | length 4.2
  Bottom Layer w0.508: C3.1 86.335,30.556 U1.5
NetC3_2: C3.2 U1.4 | length 3.5
  Bottom Layer w0.508: C3.2@87.605,30.353 U1.4
NetC4_1: C4.1 U1.6 | length 5.2
  Bottom Layer w0.508: C4.1 82.829,29.921 85.065,32.156 U1.6
NetC24_1: C24.1 R14.2 U4.14 | length 39.2
  Top Layer w0.203: R14.2 128.727,63.906 135.357,70.536 v1@135.357,70.714
  Bottom Layer w0.203: v1@134.874,78.613 135.306,78.181 v1(135.306,70.739)
  other v1: 134.925,78.537
NetD1_2: D1.2 R1.2 | length 3.6
  Top Layer w0.254: R1.2 D1.2
NetD2_2: D2.2 R2.2 | length 3.6
  Top Layer w0.254: R2.2 D2.2
NetD3_2: D3.2 R3.2 | length 3.6
  Top Layer w0.254: R3.2 D3.2
NetD4_1: D4.1 R6.1 | length 3
  Top Layer w0.762: D4.1 R6.1
NetL1_1: L1.1 NU1.32 NU1.33 | length 12.4
  Top Layer w0.254: L1.1 106.07,84.607 109.499,81.178 109.499,78.278 108.957,77.735 NU1.33 NU1.32
NetP5_2: P5.2 U5.7 | length 17.1
  Top Layer w0.203: 132.842,36.297 143.64,47.094 U5.7
NetP6_2: P6.2 R15.2 U4.16 | length 15.3
  Top Layer w0.254: P6.2 128.27,78.003 v5@129.718,76.556 ; v5(132.004,77.546) U4.16@135.694,77.546
  Bottom Layer w0.254: v5(129.718,76.581) 130.912,76.581 v5@131.978,77.648
NetP8_11: P8.11 R23.1 | length 6.3
  Bottom Layer w0.508: R23.1@110.795,40.411 110.795,34.925 P8.11@111.354,34.366
NetP8_17: P8.17 R24.1 | length 6
  Top Layer w0.508: P8.17@103.429,34.493 104.648,35.712 R24.1@104.648,40.03
NetP8_19: P8.19 R25.1 | length 5.7
  Top Layer w0.508: P8.19@101.346,34.265 R25.1@101.346,39.954
NetP20_2: P20.2 R4.1 | length 3.9
  Top Layer w0.381: P20.2@81.011,50.505 81.637,51.13 R4.1
NetP20_3: P20.3 R5.1 | length 3.3
  Top Layer w0.203: P20.3@81.011,48.505 R5.1@84.287,48.505
NetR7_1: R7.1 R8.2 U5.19 | length 7.7
  Top Layer w0.203: U5.19 149.64,47.456 148.006,45.822 R8.2 151.003,44.933 R7.1
NetR10_1: R10.1 U4.53 | length 8.2
  Top Layer w0.203: U4.53 155.751,83.565 156.54,84.353 156.54,89.56 R10.1@155.931,90.17
NRST: C27.2 NU1.25 P8.15 R16.1 REST1.2 | length 79.2
  Top Layer w0.203: v5@91.643,63.881 91.643,65.989 99.389,73.735 NU1.25 ; NU1.25@108.331,73.762 109.169,73.762 110.109,74.701 110.109,86.817
  Top Layer w0.508: R16.1@108.864,86.817 110.109,86.817 111.912,86.817 C27.2@112.014,86.716 ; C27.2@112.497,86.843 REST1.2@115.24,86.843
  Bottom Layer w0.203: 91.592,58.852 91.592,58.953 ; v5(91.592,63.906) 91.592,58.953 ; P8.15 106.299,34.646 103.924,37.02 103.924,38.773 89.662,53.035 89.662,55.702 91.592,57.633 91.592,58.953
OSCIN: C25.2 NU1.23 Y2.2 | length 8.4
  Top Layer w0.203: NU1.23@108.534,72.669 110.896,72.669 Y2.2@112.547,74.32
  Bottom Layer w0.203: Y2.2@112.928,74.473 Y2.2@113.081,74.625
  Bottom Layer w0.508: Y2.2@112.801,74.549 114.427,76.175 C25.2@115.57,76.175
OSCOUT: C26.2 NU1.24 Y2.1 | length 12.2
  Top Layer w0.254: NU1.24@108.636,73.228 109.753,73.228 111.1,74.574 111.1,78.486 Y2.1@112.497,79.883
  Bottom Layer w0.254: Y2.1@113.081,79.985 113.817,79.248 C26.2@115.926,79.248 ; Y2.1@113.259,79.781 Y2.1@113.36,79.68
PA0: NU1.34
PA1: NU1.35
PA2: NU1.36
PA3: NU1.37
PA4: NU1.40
PA5: NU1.41 NU1.74 P1.1 | length 14
  Top Layer w0.203: P1.1 78.811,84.404 84.48,78.735 NU1.74
PA6: NU1.42 NU1.75 P1.2 | length 13.1
  Top Layer w0.203: P1.2 77.699,81.864 81.328,78.235 NU1.75
PA7: NU1.43 NU1.76 P1.3 | length 12.4
  Top Layer w0.203: P1.3 75.159,79.324 76.454,78.029 ; 76.378,78.105 76.454,78.029 ; NU1.76 76.748,77.735 76.454,78.029
PA8: NU1.100 P1.4 | length 26.1
  Top Layer w0.203: 71.673,74.366 72.009,74.701 ; P1.4 72.009,74.701 ; NU1.100 85.603,65.639 72.816,65.639 71.628,66.827 71.628,74.32 72.009,74.701
PA9: NU1.101 U1.11 | length 29.9
  Top Layer w0.254: NU1.101 87.155,65.235 v4(87.528,65.608)
  Bottom Layer w0.508: U1.11 85.065,42.342 87.452,44.729 87.452,61.849 ; 87.452,61.417 87.452,61.849 ; v4@87.452,65.583 87.452,61.849
PA10: NU1.102 U1.12 | length 29.8
  Top Layer w0.254: NU1.102 88.122,64.735 v4(88.392,64.465)
  Bottom Layer w0.508: U1.12 86.335,42.469 88.392,44.526 88.392,60.427 ; 88.392,59.741 88.392,60.427 ; v4@88.392,64.541 v4(88.392,64.465) 88.392,60.427
PA11: NU1.103 R4.2 | length 20.5
  Top Layer w0.254: NU1.103 81.262,64.235 80.543,63.516 80.543,57.556 R4.2
PA12: NU1.104 R5.2 | length 23.7
  Top Layer w0.254: NU1.104 81.744,63.735 80.95,62.941 80.95,59.538 88.519,51.968 88.519,49.759 R5.2
PA13: NU1.105 P8.7 R21.1 | length 69.1
  Top Layer w0.254: NU1.105 82.996,63.235 82.067,62.306 82.067,59.944 96.596,45.415 96.596,33.426 100.305,29.718 114.021,29.718 115.24,30.937 115.24,33.096 P8.7
  Top Layer w0.508: P8.7@116.535,34.392 116.535,39.675 R21.1@116.764,39.903
PA14: NU1.109 P8.9 R20.1 R22.1 | length 50.7
  Top Layer w0.203: NU1.109 88.049,54.501 98.73,43.82 98.73,34.163 99.847,33.045 112.649,33.045 P8.9
  Top Layer w0.508: P8.9@113.97,34.925 R20.1@113.97,39.827
PA15: NU1.110 P8.5 R19.1 | length 61.9
  Top Layer w0.203: NU1.110 88.549,54.504 99.314,43.739 99.314,42.977 ; v1@99.314,35.154 99.314,42.977 ; 99.314,43.104 99.314,42.977
  Top Layer w0.508: P8.5@119.05,34.417 119.736,35.103 R19.1@119.736,40.208
  Bottom Layer w0.203: v1(99.339,35.179) 99.339,31.394 100.559,30.175 117.119,30.175 117.653,30.709 117.653,32.969 P8.5
PB0: NU1.46
PB1: NU1.47
PB2: NU1.48
PB3: NU1.133 P8.13 | length 28.8
  Top Layer w0.203: v6@100.049,49.808 100.049,51.435 ; 100.049,51.256 100.049,51.435 ; NU1.133 100.049,51.435
  Bottom Layer w0.203: v6(100.025,49.682) 108.839,40.869 P8.13
PB4: NU1.134 P8.3 R18.1 | length 46.3
  Top Layer w0.203: NU1.134 100.549,50.301 103.607,47.244 121.895,47.244 124.104,45.034 124.104,41.25 R18.1
  Top Layer w0.508: P8.3@121.514,34.468 122.377,35.331 R18.1@122.377,39.929
PB5: NU1.135
PB6: NU1.136
PB7: NU1.137
PB8: NU1.139
PB9: NU1.140
PB10: NU1.69
PB11: NU1.70
PB12: NU1.73
PC0: NU1.26
PC1: NU1.27
PC2: NU1.28
PC3: NU1.29
PC4: NU1.44
PC5: NU1.45
PC6: NU1.96 R1.1 | length 34
  Top Layer w0.254: v1(77.419,92.913) R1.1@77.419,94.767 ; v1@81.908,67.735 NU1.96
  Bottom Layer w0.254: 77.47,93.04 77.394,92.964 77.394,70.358 80.035,67.716 v1(81.966,67.716)
PC7: NU1.97 R2.1 | length 40.3
  Top Layer w0.254: v1(76.987,98.222) 76.987,98.908 R2.1 ; v1@82.373,67.235 NU1.97
  Bottom Layer w0.254: v1@76.987,98.171 76.556,97.739 76.556,69.901 79.273,67.183 v1(82.372,67.183)
PC8: NU1.98 R3.1 | length 46.1
  Top Layer w0.254: v1(75.819,102.133) 75.895,102.133 R3.1 ; v1@82.915,66.735 NU1.98
  Bottom Layer w0.254: v1@75.768,102.133 75.768,69.596 78.664,66.7 v1(82.906,66.7)
PC9: NU1.99
PC10: NU1.111
PC11: NU1.112
PC12: NU1.113
PC13: NU1.7
PC14: C50.2 NU1.8 Y1.2 | length 30.5
  Top Layer w0.254: NU1.8 112.184,65.235 v1@112.827,64.592
  Bottom Layer w0.508: v1(112.878,64.516) 127.533,64.516 Y1.2 135.661,59.36 C50.2
PC15: C51.2 NU1.9 Y1.1 | length 28.4
  Top Layer w0.254: NU1.9 113.132,65.735 v1(113.589,65.278) v1@113.614,65.253
  Bottom Layer w0.508: v1(113.589,65.278) 131.851,65.278 132.588,64.541 C51.2
PD2: NU1.116
PD3: NU1.117
PD4: NU1.118 U2.41 U4.34 U5.8 | length 159.4
  Top Layer w0.203: v6@92.549,52.316 92.549,56.65 ; NU1.118 92.549,56.65 ; 92.558,56.642 92.549,56.65 ; v1(137.236,52.299) 143.535,52.299 144.14,51.694 U5.8 ; v3(152.273,96.418) 154.661,96.418 v3(154.788,96.291) ; U4.34 154.744,74.033 162.746,74.033 v3@162.966,73.812
  Bottom Layer w0.203: v6@92.532,52.299 v1(137.236,52.299) ; 137.389,52.299 v1(137.236,52.299) ; U2.41 v3@152.261,96.406 ; v3(154.788,96.291) 163.322,87.757 v3@163.322,73.838 ; v3(163.119,73.762) 163.119,55.651 156.362,48.895 140.64,48.895 v1(137.236,52.299)
  other v6: 92.507,52.375
PD5: NU1.119 U2.17 U4.13 U5.18 | length 98.4
  Top Layer w0.203: NU1.119 93.049,65.211 v1(93.091,65.253) ; v1(128.194,81.534) 130.663,79.065 U4.13 141.752,79.065 ; 141.757,79.07 141.752,79.065 ; v1(141.808,71.628) 141.808,71.069 139.573,68.834 139.573,62.484 145.669,56.388 145.669,52.908 146.329,52.248 148.057,52.248 149.14,51.165 U5.18 ; v1(141.884,79.019) 141.839,79.065 141.752,79.065
  Bottom Layer w0.203: v1@93.066,65.303 95.148,67.386 102.006,67.386 106.045,71.425 118.059,71.425 v1@128.181,81.547 ; v1@141.861,71.706 U2.17 v1@141.861,79.019
PD6: NU1.122 P5.1 R13.2 U4.17 | length 117
  Top Layer w0.203: NU1.122 v1@94.549,65.826 ; NU1.122@94.59,58.623 94.59,50.78 99.319,46.05 104.14,46.05 R13.2 ; U4.17 v1@136.755,77.065
  Bottom Layer w0.203: P5.1 80.34,62.281 84.607,66.548 89.738,66.548 91.846,64.44 94.158,64.44 94.539,64.821 v1(94.539,65.761) 95.275,66.497 102.438,66.497 106.502,70.561 118.237,70.561 130.632,82.956 130.632,84.963 134.722,89.052 136.373,89.052 136.804,88.621 v1(136.804,77.114)
PD7: NU1.123 U5.9 | length 59.7
  Top Layer w0.203: v1@95.049,55.522 NU1.123 ; v1@144.45,55.093 144.64,54.903 U5.9
  Bottom Layer w0.203: v1(95.072,55.626) 95.555,55.143 134.137,55.143 134.163,55.169 v1@144.45,55.169
  other v1: 144.424,55.093
PE0: NU1.141 U2.39 | length 82.1
  Top Layer w0.203: v1(104.038,56.667) 104.049,56.678 NU1.141 ; v1(135.687,88.113) 135.687,94.386 136.347,95.047 143.942,95.047 v1@150.419,88.57
  Bottom Layer w0.203: v1(104.038,56.667) 108.153,60.782 108.153,67.869 108.941,68.656 ; 108.915,68.656 108.941,68.656 ; v1@135.788,88.087 135.611,88.087 131.648,84.125 131.648,81.102 119.202,68.656 108.941,68.656 ; v1(150.393,88.57) 150.393,87.147 150.661,86.88 U2.39
PE1: NU1.142 U2.40 | length 81.2
  Top Layer w0.203: v1@104.549,56.512 NU1.142 ; v1(136.068,87.706) 136.068,94.082 136.55,94.564 143.434,94.564 v1@151.257,86.741
  Bottom Layer w0.203: v1(104.572,56.49) 105.004,56.49 108.89,60.376 108.89,67.259 109.601,67.97 119.685,67.97 132.359,80.645 132.359,83.972 v1@136.144,87.757 ; v1(151.257,86.665) 151.461,86.461 U2.40
PF6: NU1.18
PF10: NU1.22
PF11: NU1.49
PG6: NU1.91 P5.3 R12.1 | length 18.7
  Top Layer w0.203: v4@75.971,68.453 75.946,68.478 R12.1 76.407,70.235 NU1.91
  Bottom Layer w0.508: P5.3 72.949,62.332 72.949,65.38 v4(75.946,68.377) ; v4@75.971,68.301 v4@76.022,68.351
PG7: NU1.92
PG8: NU1.93
PG9: NU1.124 R11.1 U4.32 | length 80.2
  Top Layer w0.203: v1@95.549,56.058 NU1.124 NU1.124@95.555,59.39 ; U4.32 158.18,73.065 R11.1
  Bottom Layer w0.203: v1(95.529,56.058) 96.063,55.524 147.422,55.524 156.261,64.364 v1@156.261,73.025
  other v1: 156.261,73.076
PG10: NU1.125 R9.1 U2.6 | length 96.3
  Top Layer w0.203: NU1.125@96.114,58.877 v5(96.114,56.439) 96.114,51.791 101.194,46.711 106.426,46.711 R9.1 ; R9.1@110.642,42.697 R9.1@111.176,42.164 ; v1(150.647,71.78) 150.901,71.526 v5(150.901,69.469)
  Bottom Layer w0.203: v5(96.114,56.439) 96.444,56.109 146.025,56.109 151.308,61.392 151.308,67.208 ; v1@150.661,71.793 U2.6 ; v5(150.901,69.469) 151.308,69.063 151.308,67.208 ; 151.308,67.742 151.308,67.208
PG11: NU1.126
PG12: NU1.127
PG13: NU1.128
PG14: NU1.129
PG15: NU1.132
R1IN: P3.1 U1.13 | length 15.5
  Bottom Layer w0.381: P3.1 76.022,37.135 87.3,37.135 87.605,37.44 U1.13
T1OUT: P3.3 U1.14 | length 17.6
  Bottom Layer w0.381: P3.3 77.165,36.246 87.681,36.246 88.875,37.44 U1.14
"USB 5V": P20.1
VDD5: C2.1 C9.1 C11.1 J1.1 U1.16 U3.3 | length 28.1
  Top Layer w1.27: C11.1@83.109,109.347 C9.1 86.766,110.769 83.058,114.478 83.058,117.323 83.058,117.983 83.058,118.821 84.531,120.294 90.199,120.294 U3.3
  Bottom Layer w0.508: U1.16 93.564,39.074 C2.1
VDD33: C10.1 C12.1 C14.2 C15.2 C16.2 C17.2 C18.2 C19.2 C20.2 C21.1 C22.1 C23.1 D1.1 D2.1 D3.1 L1.2 NU1.17 NU1.39 NU1.52 NU1.62 NU1.72 NU1.84 NU1.95 NU1.108 NU1.121 NU1.131 NU1.144 P7.1 P8.1 P8.2 R6.2 R8.1 R9.2 R10.2 R11.2 R12.2 R13.1 R14.1 R15.1 R16.2 R18.2 R19.2 R20.2 R21.2 U2.11 U2.33 U3.2 U4.29 U4.43 U5.12 U5.37 | length 361.4
  Top Layer w0.254: C17.2 73.802,69.632 R12.2 75.895,72.009 C23.1 77.165,74.143 82.347,74.143 82.754,73.735 NU1.84 ; C16.2 81.148,68.235 NU1.95 ; C15.2@86.858,86.512 86.858,82.777 NU1.72 ; C18.2@86.934,89.342 86.985,89.393 86.985,89.342 C15.2 ; C21.1 104.549,85.595 NU1.39 ; NU1.144 105.549,68.669 106.616,69.735 NU1.17 ; 107.137,40.081 R13.1 ; C14.2 146.14,45.49 U5.12 ; v4@145.44,64.872 146.14,65.571 U5.37 ; v7(145.872,82.601) 145.872,79.451 147.269,78.054 153.238,78.054 153.746,78.562 154.71,78.562 U4.43 154.735,78.588 167.259,78.588 ; C14.2@145.887,44.765 R8.1 ; U4.29 157.62,71.565 R11.2
  Top Layer w0.508: C21.1@103.53,86.944 105.446,88.859 108.265,88.859 R16.2 ; R13.1@108.052,40.234 111.455,40.234 113.538,42.316 R18.2@122.784,42.316 ; P8.2 P8.1 128.727,38.964 R14.1 ; 141.656,34.9 141.656,42.672 143.749,44.765 C14.2
  Top Layer w0.762: C22.1 74.219,106.426 ; R6.2 74.219,103.657 74.219,106.426 ; D1.1 D2.1 D3.1 83.134,106.426 74.219,106.426
  Top Layer w1.27: U3.2 95.603,116.304 C12.1 160.477,116.891 167.259,110.109 167.259,78.588 167.259,37.008 164.567,34.315 P8.1
  Bottom Layer w0.254: C10.1 145.415,63.144 v4(145.415,64.872) ; C20.2@145.861,86.135 U2.33 145.861,82.612 v7(145.872,82.601)
pads on no net: NU1.6 NU1.106 P20.5 P20.6 REST1.3 REST1.4 U1.7 U1.8 U1.9 U1.10 U4.1 U4.27 U4.28 U4.30 U4.55 U4.56 U5.1 U5.2 U5.3 U5.4 U5.5 U5.6 U5.10 U5.11 U5.14 U5.15 U5.20 U5.21 U5.22 U5.23 U5.24 U5.25 U5.26 U5.27 U5.28 U5.33 U5.34 U5.35 U5.38 U5.39 U5.40 U5.45 U5.46 U5.47 U5.48
copper on no net: | length 176.4
  Bottom Layer w0.254: 29.287,124.199 29.783,125.727 ; 29.529,125.725 30.037,125.729 ; 30.001,28.746 30.52,27.225 ; 30.08,86.023 29.783,125.727 ; 30.223,66.929 30.52,27.225 ; 30.266,27.224 30.774,27.227 ; 30.303,124.206 29.783,125.727 ; 31.017,28.753 30.52,27.225 ; 68.351,125.247 68.351,125.755 ; 69.875,124.993 68.351,125.501 ; 69.875,126.009 68.351,125.501 ; 109.401,125.501 68.351,125.501 ; 128.242,125.501 169.291,125.501 ; 167.767,124.993 169.291,125.501 ; 167.767,126.009 169.291,125.501 ; 169.291,125.247 169.291,125.755

## Keep-outs
Keep-Out Layer:
  lines w0.254: 39.624,35.306 39.624,116.967 39.624,123.571 40.005,123.952 169.037,123.952 ; 169.113,35.281 169.113,123.927

## Other copper
Bottom Layer:
  text "100.9396 (mm)" at 109.655,124.587 h1.52
  text "98.50395 (mm)" at 29.168,85.762 h1.52 r270.43

## Text inside footprints (layer, text, board x,y; h text height)
P8: Top Overlay "20" at 99.695,32.283 h0.89 r180; Top Overlay "19" at 99.695,34.823 h0.89 r180; Top Overlay "1" at 126.619,34.823 h0.89 r180; Top Overlay "2" at 126.619,32.283 h0.89 r180